# Altium PCB 175-00060, rev2, PCB, NRES RTD_TEC Board.PcbDoc (part 3 of 4)
Units mm, origin at the board's own origin, x right, y up, seen from the top; angles counter-clockwise.
Board outline 188.3 x 85 mm, 8 copper layers (Top Layer (*.GTL), MidLayer1 (*.G1), InternalPlane1 (*.GP1), InternalPlane2 (*.GP2), InternalPlane3 (*.GP3), InternalPlane4 (*.GP4), MidLayer2 (*.G2), Bottom Layer (*.GBL)), stack 1.748 mm thick; 256 components, 199 nets, 1067 pads, 575 vias.
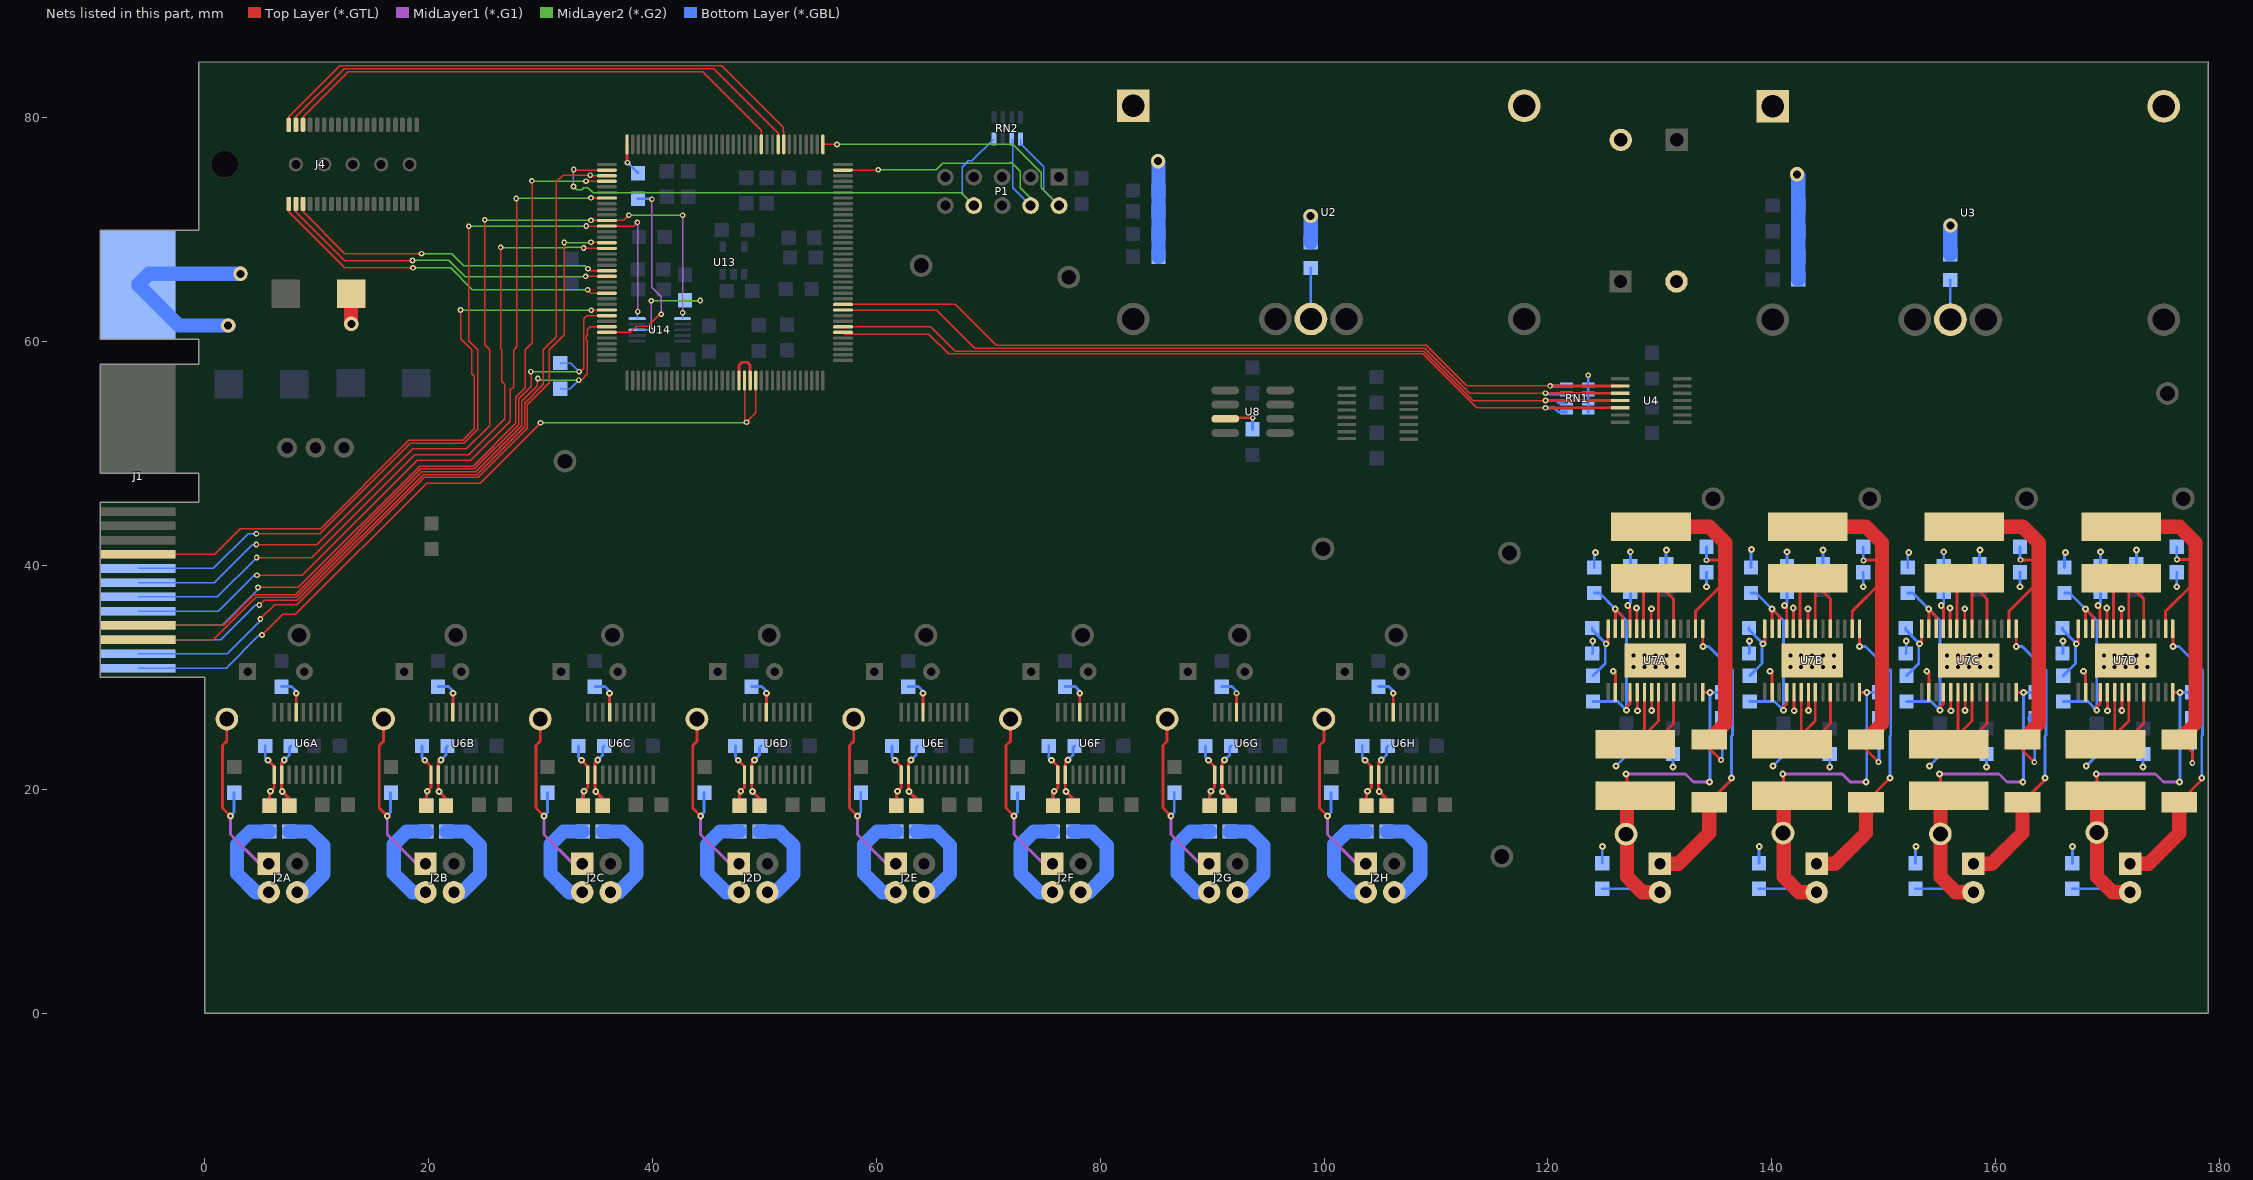
[diagram p9: the nets of this part, all layers, seen from the top]

## Via types
v1: diameter 0.508, hole 0.254, Top Layer (*.GTL) to Bottom Layer (*.GBL), tented both sides, 324 vias
v2: diameter 0.61, hole 0.254, Top Layer (*.GTL) to Bottom Layer (*.GBL), tented both sides, 234 vias
v3: diameter 1.27, hole 0.711, Top Layer (*.GTL) to Bottom Layer (*.GBL), 17 vias

## Nets (pads, with @x,y where several pads share a name; then routed paths per layer and width w, separated by ;. In a path a pad name is that pad's centre, name@x,y a point inside that pad or via, vN(x,y) a via of type N, cw(c..) or ccw(c..) an arc to the next point about the centre after c; other vN are vias at no path point) (continued)
I2C_SDA: J1.S21 U13.27 | length 58.9
  Top Layer (*.GTL) w0.127: J1.S21@-5.95,40.985 0.904,40.985 3.188,43.269 10.369,43.269 18.255,51.156 23.056,51.156 24.079,52.179 24.079,56.896 23.863,57.112 23.863,59.258 22.885,60.236 v1@22.885,62.814 ; v1(34.544,62.789) 34.561,62.806 U13.27@35.932,62.806
  MidLayer2 (*.G2) w0.127: v1(22.86,62.814) 22.885,62.789 v1(34.544,62.789)
LV_TEC_ENB_0: RN1.2 U4.2 U13.83 | length 74
  Top Layer (*.GTL) w0.127: U13.83@57.032,63.306 67.047,63.306 70.714,59.639 109.118,59.639 112.736,56.022 v1@120.203,56.022
  Top Layer (*.GTL) w0.254: v1@120.203,56.022 U4.2@126.454,56.022
  Bottom Layer (*.GBL) w0.254: v1@120.269,56.108 v1(120.193,56.032) 121.57,56.032 RN1.2@121.646,56.108
LV_TEC_ENB_1: RN1.4 U4.3 U13.82 | length 74.4
  Top Layer (*.GTL) w0.127: U13.82@57.032,62.806 65.388,62.806 68.809,59.385 109.013,59.385 113.026,55.372 120.203,55.372
  Top Layer (*.GTL) w0.254: 120.203,55.372 U4.3@126.454,55.372
  Bottom Layer (*.GBL) w0.254: v1(119.786,55.382) 119.86,55.308 RN1.4@121.646,55.308
LV_TEC_ENB_2: RN1.6 U4.4 U13.79 | length 74.1
  Top Layer (*.GTL) w0.127: U13.79@57.032,61.306 64.881,61.306 67.056,59.131 108.908,59.131 113.317,54.722 v1(119.786,54.722) 120.203,54.722
  Top Layer (*.GTL) w0.254: 120.203,54.722 U4.4@126.454,54.722
  Bottom Layer (*.GBL) w0.254: v1(119.786,54.722) 120.723,54.722 120.936,54.508 RN1.6@121.646,54.508
LV_TEC_ENB_3: RN1.8 U4.5 U13.78 | length 74.2
  Top Layer (*.GTL) w0.127: U13.78@57.032,60.806 57.192,60.647 64.7,60.647 66.469,58.877 108.803,58.877 113.618,54.062 v1(119.786,54.062)
  Top Layer (*.GTL) w0.254: v1(119.786,54.062) 119.797,54.072 U4.5@126.454,54.072
  Bottom Layer (*.GBL) w0.254: v1(119.786,54.062) 120.583,54.062 120.936,53.708 RN1.8@121.646,53.708
MISO: J1.S6 U13.16 | length 64.4
  Top Layer (*.GTL) w0.127: v1(4.648,40.691) 9.587,40.691 18.781,49.886 23.582,49.886 26.797,53.101 26.797,56.185 26.53,56.451 26.53,59.258 26.441,59.347 v1(26.441,68.402) ; v1(33.858,68.351) 33.904,68.306 U13.16@35.932,68.306
  MidLayer2 (*.G2) w0.127: v1(26.441,68.402) 26.454,68.389 32.315,68.389 32.328,68.402 33.858,68.402 v1(33.858,68.351)
  Bottom Layer (*.GBL) w0.127: J1.S6@-5.95,37.175 1.133,37.175 v1(4.648,40.691)
MOSI: J1.S2 U13.15 | length 65
  Top Layer (*.GTL) w0.127: v1(4.978,35.204) 6.248,36.474 8.244,36.474 19.623,47.854 24.424,47.854 28.829,52.259 28.829,54.331 30.797,56.299 30.797,59.258 32.131,60.592 v1(32.131,68.834) ; v1(34.519,68.859) 35.879,68.859 U13.15@35.932,68.806
  MidLayer2 (*.G2) w0.127: v1(32.131,68.834) 34.493,68.834 v1(34.519,68.859)
  Bottom Layer (*.GBL) w0.127: J1.S2@-5.95,32.095 2.022,32.095 4.978,35.052 v1(4.978,35.204)
NetC20A_2: C20A.2 U6A.7 | length 3.4
  Top Layer (*.GTL) w0.254: U6A.7@8.174,26.861 8.179,26.865 v2(8.179,28.575)
  Bottom Layer (*.GBL) w0.254: C20A.2@6.858,29.159 7.772,29.159 8.179,28.753 v2(8.179,28.575)
NetC20B_2: C20B.2 U6B.7 | length 3.4
  Top Layer (*.GTL) w0.254: U6B.7@22.174,26.861 22.179,26.865 v2(22.179,28.575)
  Bottom Layer (*.GBL) w0.254: C20B.2@20.858,29.159 21.772,29.159 22.179,28.753 v2(22.179,28.575)
NetC20C_2: C20C.2 U6C.7 | length 3.4
  Top Layer (*.GTL) w0.254: U6C.7@36.174,26.861 36.179,26.865 v2(36.179,28.575)
  Bottom Layer (*.GBL) w0.254: C20C.2@34.858,29.159 35.772,29.159 36.179,28.753 v2(36.179,28.575)
NetC20D_2: C20D.2 U6D.7 | length 3.4
  Top Layer (*.GTL) w0.254: U6D.7@50.174,26.861 50.179,26.865 v2(50.179,28.575)
  Bottom Layer (*.GBL) w0.254: C20D.2@48.858,29.159 49.772,29.159 50.179,28.753 v2(50.179,28.575)
NetC20E_2: C20E.2 U6E.7 | length 3.4
  Top Layer (*.GTL) w0.254: U6E.7@64.174,26.861 64.179,26.865 v2(64.179,28.575)
  Bottom Layer (*.GBL) w0.254: C20E.2@62.858,29.159 63.772,29.159 64.179,28.753 v2(64.179,28.575)
NetC20F_2: C20F.2 U6F.7 | length 3.4
  Top Layer (*.GTL) w0.254: U6F.7@78.174,26.861 78.179,26.865 v2(78.179,28.575)
  Bottom Layer (*.GBL) w0.254: C20F.2@76.858,29.159 77.772,29.159 78.179,28.753 v2(78.179,28.575)
NetC20G_2: C20G.2 U6G.7 | length 3.4
  Top Layer (*.GTL) w0.254: U6G.7@92.174,26.861 92.179,26.865 v1(92.179,28.575)
  Bottom Layer (*.GBL) w0.254: C20G.2@90.858,29.159 91.772,29.159 92.179,28.753 v1(92.179,28.575)
NetC20H_2: C20H.2 U6H.7 | length 3.4
  Top Layer (*.GTL) w0.254: U6H.7@106.174,26.861 106.179,26.865 v2(106.179,28.575)
  Bottom Layer (*.GBL) w0.254: C20H.2@104.858,29.159 105.772,29.159 106.179,28.753 v2(106.179,28.575)
NetC21A_1: C21A.1 C25A.2 L1A.2 R7A.2 U7A.16 | length 39.7
  Top Layer (*.GTL) w0.254: U7A.16@133.175,34.348 133.175,35.895 135.842,38.562 135.842,38.613 ; v1(134.163,40.462) 135.842,40.462 ; R7A.2@134.4,24.44 134.4,23.664 v1(135.458,22.606)
  Top Layer (*.GTL) w1.27: L1A.2@129.2,43.451 134.407,43.451 135.842,42.017 135.842,40.462 135.842,38.613 ; R7A.2@134.4,24.44 135.842,25.882 135.842,38.562
  Bottom Layer (*.GBL) w0.254: v1(134.163,40.462) 134.166,40.465 C21A.1@134.166,41.661 ; v1(135.458,22.606) 135.563,22.71 C25A.2@135.563,26.37
NetC21B_1: C21B.1 C25B.2 L1B.2 R7B.2 U7B.16 | length 40.1
  Top Layer (*.GTL) w0.254: U7B.16@147.175,34.348 147.175,35.895 149.842,38.562 ; v1(148.184,40.437) 148.234,40.488 149.842,40.488 ; R7B.2@148.4,24.44 148.4,23.558 v1(149.53,22.428)
  Top Layer (*.GTL) w1.27: L1B.2@143.2,43.451 148.407,43.451 149.842,42.017 149.842,40.488 149.842,38.562 149.842,25.882 R7B.2@148.4,24.44
  Bottom Layer (*.GBL) w0.254: C21B.1@148.166,41.661 148.166,40.455 v1(148.184,40.437) ; v1(149.53,22.428) 149.563,22.461 C25B.2@149.563,26.37
NetC21C_1: C21C.1 C25C.2 L1C.2 R7C.2 U7C.16 | length 40.1
  Top Layer (*.GTL) w0.254: U7C.16@161.175,34.348 161.175,35.895 163.842,38.562 163.842,38.613 ; v1(162.204,40.488) 163.817,40.488 163.842,40.513 ; R7C.2@162.4,24.44 162.4,23.452 v1(163.449,22.403)
  Top Layer (*.GTL) w1.27: L1C.2@157.2,43.451 162.407,43.451 163.842,42.017 163.842,40.513 163.842,38.613 ; R7C.2@162.4,24.44 163.842,25.882 163.842,38.562
  Bottom Layer (*.GBL) w0.254: C21C.1@162.166,41.661 162.166,40.526 v1(162.204,40.488) ; v1(163.449,22.403) 163.486,22.44 C25C.2@163.486,26.294
  Bottom Layer (*.GBL) w1.27: C25C.2@163.486,26.294 C25C.2@163.563,26.37
NetC21D_1: C21D.1 C25D.2 L1D.2 R7D.2 U7D.16 | length 40.2
  Top Layer (*.GTL) w0.254: U7D.16@175.175,34.348 175.175,35.895 177.842,38.562 177.842,38.613 ; v1(176.2,40.513) 177.817,40.513 177.842,40.488 ; R7D.2@176.4,24.44 177.563,23.277 v1(177.563,22.335)
  Top Layer (*.GTL) w1.27: L1D.2@171.2,43.451 176.407,43.451 177.842,42.017 177.842,40.488 177.842,38.613 ; R7D.2@176.4,24.44 177.842,25.882 177.842,38.562
  Bottom Layer (*.GBL) w0.254: C21D.1@176.166,41.661 176.166,40.547 v1(176.2,40.513) ; v1(177.563,22.335) C25D.2@177.563,26.37
NetC26A_2: C26A.2 R8A.2 U7A.4 U7A.26 U7A.27 | length 20.7
  Top Layer (*.GTL) w0.254: v2(126.012,36.098) v2@126.025,36.086 ; U7A.27@126.025,34.348 v2@126.025,36.086 ; U7A.26@126.675,34.348 126.675,35.436 v2@126.025,36.086 ; v2(127.028,27.056) 127.028,27.335 127.325,27.632 U7A.4@127.325,28.648
  Bottom Layer (*.GBL) w0.254: R8A.2@124.031,27.843 126.241,27.843 v2(127.028,27.056) 127.028,35.082 v2(126.012,36.098) 124.59,37.521 C26A.2@124.133,37.521
NetC26B_2: C26B.2 R8B.2 U7B.4 U7B.26 U7B.27 | length 20.7
  Top Layer (*.GTL) w0.254: v2(140.012,36.098) v2@140.025,36.086 ; U7B.27@140.025,34.348 v2@140.025,36.086 ; U7B.26@140.675,34.348 140.675,35.436 v2@140.025,36.086 ; v2(141.028,27.056) 141.028,27.335 141.325,27.632 U7B.4@141.325,28.648
  Bottom Layer (*.GBL) w0.254: R8B.2@138.031,27.843 140.241,27.843 v2(141.028,27.056) 141.028,35.082 v2(140.012,36.098) 138.59,37.521 C26B.2@138.133,37.521
NetC26C_2: C26C.2 R8C.2 U7C.4 U7C.26 U7C.27 | length 20.7
  Top Layer (*.GTL) w0.254: v2(154.012,36.098) v2@154.025,36.086 ; U7C.27@154.025,34.348 v2@154.025,36.086 ; U7C.26@154.675,34.348 154.675,35.436 v2@154.025,36.086 ; v2(155.028,27.056) 155.028,27.335 155.325,27.632 U7C.4@155.325,28.648
  Bottom Layer (*.GBL) w0.254: R8C.2@152.031,27.843 154.241,27.843 v2(155.028,27.056) 155.028,35.082 v2(154.012,36.098) 152.59,37.521 C26C.2@152.133,37.521
NetC26D_2: C26D.2 R8D.2 U7D.4 U7D.26 U7D.27 | length 20.7
  Top Layer (*.GTL) w0.254: v2(168.012,36.098) v2@168.025,36.086 ; U7D.27@168.025,34.348 v2@168.025,36.086 ; U7D.26@168.675,34.348 168.675,35.436 v2@168.025,36.086 ; v2(169.028,27.056) 169.028,27.335 169.325,27.632 U7D.4@169.325,28.648
  Bottom Layer (*.GBL) w0.254: R8D.2@166.031,27.843 168.241,27.843 v2(169.028,27.056) 169.028,35.082 v2(168.012,36.098) 166.59,37.521 C26D.2@166.133,37.521
NetC28A_2: C28A.2 U7A.25 | length 3.4
  Top Layer (*.GTL) w0.254: v2(127.13,36.403) 127.325,36.208 U7A.25@127.325,34.348
  Bottom Layer (*.GBL) w0.254: v2(127.13,36.403) 127.358,36.632 C28A.2@127.358,37.622
NetC28B_2: C28B.2 U7B.25 | length 3.4
  Top Layer (*.GTL) w0.254: v2(141.13,36.403) 141.325,36.208 U7B.25@141.325,34.348
  Bottom Layer (*.GBL) w0.254: v2(141.13,36.403) 141.358,36.632 C28B.2@141.358,37.622
NetC28C_2: C28C.2 U7C.25 | length 3.4
  Top Layer (*.GTL) w0.254: v2(155.13,36.403) 155.325,36.208 U7C.25@155.325,34.348
  Bottom Layer (*.GBL) w0.254: v2(155.13,36.403) 155.358,36.632 C28C.2@155.358,37.622
NetC28D_2: C28D.2 U7D.25 | length 3.4
  Top Layer (*.GTL) w0.254: v2(169.13,36.403) 169.325,36.208 U7D.25@169.325,34.348
  Bottom Layer (*.GBL) w0.254: v2(169.13,36.403) 169.358,36.632 C28D.2@169.358,37.622
NetC30_1: C30.1 U8.3 | length 3.5
  Top Layer (*.GTL) w0.254: U8.3@91.174,53.086 91.276,53.188 v1(93.624,53.188)
  Bottom Layer (*.GBL) w0.254: C30.1@93.599,52.146 93.599,53.162 v1(93.624,53.188)
NetJ2A_1: J2A.1 R3A.1 TP5A.1 | length 17.5
  Top Layer (*.GTL) w0.254: TP5A.1@1.981,26.264 1.981,24.282 1.6,23.901 1.6,18.313 v2(2.311,17.602)
  MidLayer1 (*.G1) w0.254: v2(2.311,17.602) 2.311,15.951 4.923,13.34 J2A.1@5.73,13.34
  Bottom Layer (*.GBL) w0.254: v2(2.311,17.602) 2.616,17.907 R3A.1@2.616,19.71
NetJ2A_2: J2A.2 R4A.1 | length 9.5
  Bottom Layer (*.GBL) w0.254: J2A.2@4.796,10.8 J2A.2@5.73,10.8
  Bottom Layer (*.GBL) w1.27: J2A.2@4.796,10.8 4.567,10.8 2.896,12.471 2.896,15.062 4.064,16.231 R4A.1@5.791,16.231
NetJ2A_3: J2A.3 R5A.1 | length 9.1
  Bottom Layer (*.GBL) w0.254: J2A.3@8.27,10.8 J2A.3@8.275,10.795
  Bottom Layer (*.GBL) w1.27: R5A.1@7.569,16.231 9.322,16.231 10.592,14.961 10.592,12.395 8.997,10.8 J2A.3@8.27,10.8
NetJ2B_1: J2B.1 R3B.1 TP5B.1 | length 17.5
  Top Layer (*.GTL) w0.254: TP5B.1@15.981,26.264 15.981,24.282 15.6,23.901 15.6,18.313 v2(16.311,17.602)
  MidLayer1 (*.G1) w0.254: v2(16.311,17.602) 16.311,15.951 18.923,13.34 J2B.1@19.73,13.34
  Bottom Layer (*.GBL) w0.254: v2(16.311,17.602) 16.616,17.907 R3B.1@16.616,19.71
NetJ2B_2: J2B.2 R4B.1 | length 9.5
  Bottom Layer (*.GBL) w0.254: J2B.2@18.796,10.8 J2B.2@19.73,10.8
  Bottom Layer (*.GBL) w1.27: J2B.2@18.796,10.8 18.567,10.8 16.896,12.471 16.896,15.062 18.064,16.231 R4B.1@19.791,16.231
NetJ2B_3: J2B.3 R5B.1 | length 9.1
  Bottom Layer (*.GBL) w0.254: J2B.3@22.27,10.8 J2B.3@22.275,10.795
  Bottom Layer (*.GBL) w1.27: R5B.1@21.569,16.231 23.322,16.231 24.592,14.961 24.592,12.395 22.997,10.8 J2B.3@22.27,10.8
NetJ2C_1: J2C.1 R3C.1 TP5C.1 | length 17.5
  Top Layer (*.GTL) w0.254: TP5C.1@29.981,26.264 29.981,24.282 29.6,23.901 29.6,18.313 v2(30.311,17.602)
  MidLayer1 (*.G1) w0.254: v2(30.311,17.602) 30.311,15.951 32.923,13.34 J2C.1@33.73,13.34
  Bottom Layer (*.GBL) w0.254: v2(30.311,17.602) 30.616,17.907 R3C.1@30.616,19.71
NetJ2C_2: J2C.2 R4C.1 | length 9.5
  Bottom Layer (*.GBL) w0.254: J2C.2@32.796,10.8 J2C.2@33.73,10.8
  Bottom Layer (*.GBL) w1.27: J2C.2@32.796,10.8 32.567,10.8 30.896,12.471 30.896,15.062 32.064,16.231 R4C.1@33.791,16.231
NetJ2C_3: J2C.3 R5C.1 | length 9.1
  Bottom Layer (*.GBL) w0.254: J2C.3@36.27,10.8 J2C.3@36.275,10.795
  Bottom Layer (*.GBL) w1.27: R5C.1@35.569,16.231 37.322,16.231 38.592,14.961 38.592,12.395 36.997,10.8 J2C.3@36.27,10.8
NetJ2D_1: J2D.1 R3D.1 TP5D.1 | length 17.5
  Top Layer (*.GTL) w0.254: TP5D.1@43.981,26.264 43.981,24.282 43.6,23.901 43.6,18.313 v2(44.311,17.602)
  MidLayer1 (*.G1) w0.254: v2(44.311,17.602) 44.311,15.951 46.923,13.34 J2D.1@47.73,13.34
  Bottom Layer (*.GBL) w0.254: v2(44.311,17.602) 44.616,17.907 R3D.1@44.616,19.71
NetJ2D_2: J2D.2 R4D.1 | length 9.5
  Bottom Layer (*.GBL) w0.254: J2D.2@46.796,10.8 J2D.2@47.73,10.8
  Bottom Layer (*.GBL) w1.27: J2D.2@46.796,10.8 46.567,10.8 44.896,12.471 44.896,15.062 46.064,16.231 R4D.1@47.791,16.231
NetJ2D_3: J2D.3 R5D.1 | length 9.1
  Bottom Layer (*.GBL) w0.254: J2D.3@50.27,10.8 J2D.3@50.275,10.795
  Bottom Layer (*.GBL) w1.27: R5D.1@49.569,16.231 51.322,16.231 52.592,14.961 52.592,12.395 50.997,10.8 J2D.3@50.27,10.8
NetJ2E_1: J2E.1 R3E.1 TP5E.1 | length 17.5
  Top Layer (*.GTL) w0.254: TP5E.1@57.981,26.264 57.981,24.282 57.6,23.901 57.6,18.313 v2(58.311,17.602)
  MidLayer1 (*.G1) w0.254: v2(58.311,17.602) 58.311,15.951 60.923,13.34 J2E.1@61.73,13.34
  Bottom Layer (*.GBL) w0.254: v2(58.311,17.602) 58.616,17.907 R3E.1@58.616,19.71
NetJ2E_2: J2E.2 R4E.1 | length 9.5
  Bottom Layer (*.GBL) w0.254: J2E.2@60.796,10.8 J2E.2@61.73,10.8
  Bottom Layer (*.GBL) w1.27: J2E.2@60.796,10.8 60.567,10.8 58.896,12.471 58.896,15.062 60.064,16.231 R4E.1@61.791,16.231
NetJ2E_3: J2E.3 R5E.1 | length 9.1
  Bottom Layer (*.GBL) w0.254: J2E.3@64.27,10.8 J2E.3@64.275,10.795
  Bottom Layer (*.GBL) w1.27: R5E.1@63.569,16.231 65.322,16.231 66.592,14.961 66.592,12.395 64.997,10.8 J2E.3@64.27,10.8
NetJ2F_1: J2F.1 R3F.1 TP5F.1 | length 17.5
  Top Layer (*.GTL) w0.254: TP5F.1@71.981,26.264 71.981,24.282 71.6,23.901 71.6,18.313 v2(72.311,17.602)
  MidLayer1 (*.G1) w0.254: v2(72.311,17.602) 72.311,15.951 74.923,13.34 J2F.1@75.73,13.34
  Bottom Layer (*.GBL) w0.254: v2(72.311,17.602) 72.616,17.907 R3F.1@72.616,19.71
NetJ2F_2: J2F.2 R4F.1 | length 9.5
  Bottom Layer (*.GBL) w0.254: J2F.2@74.796,10.8 J2F.2@75.73,10.8
  Bottom Layer (*.GBL) w1.27: J2F.2@74.796,10.8 74.567,10.8 72.896,12.471 72.896,15.062 74.064,16.231 R4F.1@75.791,16.231
NetJ2F_3: J2F.3 R5F.1 | length 9.1
  Bottom Layer (*.GBL) w0.254: J2F.3@78.27,10.8 J2F.3@78.275,10.795
  Bottom Layer (*.GBL) w1.27: R5F.1@77.569,16.231 79.322,16.231 80.592,14.961 80.592,12.395 78.997,10.8 J2F.3@78.27,10.8
NetJ2G_1: J2G.1 R3G.1 TP5G.1 | length 17.5
  Top Layer (*.GTL) w0.254: TP5G.1@85.981,26.264 85.981,24.282 85.6,23.901 85.6,18.313 v2(86.311,17.602)
  MidLayer1 (*.G1) w0.254: v2(86.311,17.602) 86.311,15.951 88.923,13.34 J2G.1@89.73,13.34
  Bottom Layer (*.GBL) w0.254: v2(86.311,17.602) 86.616,17.907 R3G.1@86.616,19.71
NetJ2G_2: J2G.2 R4G.1 | length 9.5
  Bottom Layer (*.GBL) w0.254: J2G.2@88.796,10.8 J2G.2@89.73,10.8
  Bottom Layer (*.GBL) w1.27: J2G.2@88.796,10.8 88.567,10.8 86.896,12.471 86.896,15.062 88.064,16.231 R4G.1@89.791,16.231
NetJ2G_3: J2G.3 R5G.1 | length 9.1
  Bottom Layer (*.GBL) w0.254: J2G.3@92.27,10.8 J2G.3@92.275,10.795
  Bottom Layer (*.GBL) w1.27: R5G.1@91.569,16.231 93.322,16.231 94.592,14.961 94.592,12.395 92.997,10.8 J2G.3@92.27,10.8
NetJ2H_1: J2H.1 R3H.1 TP5H.1 | length 17.5
  Top Layer (*.GTL) w0.254: TP5H.1@99.981,26.264 99.981,24.282 99.6,23.901 99.6,18.313 v2(100.311,17.602)
  MidLayer1 (*.G1) w0.254: v2(100.311,17.602) 100.311,15.951 102.923,13.34 J2H.1@103.73,13.34
  Bottom Layer (*.GBL) w0.254: v2(100.311,17.602) 100.616,17.907 R3H.1@100.616,19.71
NetJ2H_2: J2H.2 R4H.1 | length 9.5
  Bottom Layer (*.GBL) w0.254: J2H.2@102.796,10.8 J2H.2@103.73,10.8
  Bottom Layer (*.GBL) w1.27: J2H.2@102.796,10.8 102.567,10.8 100.896,12.471 100.896,15.062 102.064,16.231 R4H.1@103.791,16.231
NetJ2H_3: J2H.3 R5H.1 | length 9.1
  Bottom Layer (*.GBL) w0.254: J2H.3@106.27,10.8 J2H.3@106.275,10.795
  Bottom Layer (*.GBL) w1.27: R5H.1@105.569,16.231 107.322,16.231 108.592,14.961 108.592,12.395 106.997,10.8 J2H.3@106.27,10.8
NetL1A_1: L1A.1 U7A.19 U7A.21 U7A.23 | length 15
  Top Layer (*.GTL) w0.254: U7A.23@128.525,34.348 128.525,38.179 L1A.1@129.2,38.854 ; U7A.21@129.875,34.348 129.875,38.179 L1A.1@129.2,38.854 ; U7A.19@131.225,34.348 131.225,36.982 129.353,38.854 L1A.1@129.2,38.854
NetL1B_1: L1B.1 U7B.19 U7B.21 U7B.23 | length 15
  Top Layer (*.GTL) w0.254: U7B.23@142.525,34.348 142.525,38.179 L1B.1@143.2,38.854 ; U7B.21@143.875,34.348 143.875,38.179 L1B.1@143.2,38.854 ; U7B.19@145.225,34.348 145.225,36.982 143.353,38.854 L1B.1@143.2,38.854
NetL1C_1: L1C.1 U7C.19 U7C.21 U7C.23 | length 15
  Top Layer (*.GTL) w0.254: U7C.23@156.525,34.348 156.525,38.179 L1C.1@157.2,38.854 ; U7C.21@157.875,34.348 157.875,38.179 L1C.1@157.2,38.854 ; U7C.19@159.225,34.348 159.225,36.982 157.353,38.854 L1C.1@157.2,38.854
NetL1D_1: L1D.1 U7D.19 U7D.21 U7D.23 | length 15
  Top Layer (*.GTL) w0.254: U7D.23@170.525,34.348 170.525,38.179 L1D.1@171.2,38.854 ; U7D.21@171.875,34.348 171.875,38.179 L1D.1@171.2,38.854 ; U7D.19@173.225,34.348 173.225,36.982 171.353,38.854 L1D.1@171.2,38.854
NetL2A_1: L2A.1 U7A.6 U7A.8 U7A.10 | length 16.2
  Top Layer (*.GTL) w0.254: U7A.6@128.625,28.648 L2A.1@128.625,24.851 ; U7A.8@129.875,28.648 129.875,26.101 L2A.1@128.625,24.851 ; U7A.10@131.225,28.648 131.225,25.868 129.383,24.026 L2A.1@127.8,24.026 L2A.1@128.625,24.851
NetL2B_1: L2B.1 U7B.6 U7B.8 U7B.10 | length 16.2
  Top Layer (*.GTL) w0.254: U7B.6@142.625,28.648 L2B.1@142.625,24.851 ; U7B.8@143.875,28.648 143.875,26.101 L2B.1@142.625,24.851 ; U7B.10@145.225,28.648 145.225,25.868 143.383,24.026 L2B.1@141.8,24.026 L2B.1@142.625,24.851
NetL2C_1: L2C.1 U7C.6 U7C.8 U7C.10 | length 16.2
  Top Layer (*.GTL) w0.254: U7C.6@156.625,28.648 L2C.1@156.625,24.851 ; U7C.8@157.875,28.648 157.875,26.101 L2C.1@156.625,24.851 ; U7C.10@159.225,28.648 159.225,25.868 157.383,24.026 L2C.1@155.8,24.026 L2C.1@156.625,24.851
NetL2D_1: L2D.1 U7D.6 U7D.8 U7D.10 | length 16.2
  Top Layer (*.GTL) w0.254: U7D.6@170.625,28.648 L2D.1@170.625,24.851 ; U7D.8@171.875,28.648 171.875,26.101 L2D.1@170.625,24.851 ; U7D.10@173.225,28.648 173.225,25.868 171.383,24.026 L2D.1@169.8,24.026 L2D.1@170.625,24.851
NetR1_2: R1.2 U2.4 | length 4.6
  Bottom Layer (*.GBL) w0.254: R1.2@98.806,66.548 98.806,62.019 U2.4@98.825,62
NetR2_2: R2.2 U3.4 | length 3.5
  Bottom Layer (*.GBL) w0.254: R2.2@155.931,65.481 155.931,61.969 U3.4@155.95,61.95
NetR8A_1: R8A.1 R9A.2 U7A.28 | length 6.7
  Top Layer (*.GTL) w0.254: v2(125.199,33) 125.375,33.175 U7A.28@125.375,34.348
  Bottom Layer (*.GBL) w0.254: R9A.2@123.955,34.397 123.955,34.244 v2(125.199,33) 125.123,32.923 125.123,31.222 R8A.1@124.031,30.129
NetR8B_1: R8B.1 R9B.2 U7B.28 | length 6.7
  Top Layer (*.GTL) w0.254: v2(139.199,33) 139.375,33.175 U7B.28@139.375,34.348
  Bottom Layer (*.GBL) w0.254: R9B.2@137.955,34.397 137.955,34.244 v2(139.199,33) 139.123,32.923 139.123,31.222 R8B.1@138.031,30.129
NetR8C_1: R8C.1 R9C.2 U7C.28 | length 6.7
  Top Layer (*.GTL) w0.254: v2(153.199,33) 153.375,33.175 U7C.28@153.375,34.348
  Bottom Layer (*.GBL) w0.254: R9C.2@151.955,34.397 151.955,34.244 v2(153.199,33) 153.123,32.923 153.123,31.222 R8C.1@152.031,30.129
NetR8D_1: R8D.1 R9D.2 U7D.28 | length 6.7
  Top Layer (*.GTL) w0.254: v2(167.199,33) 167.375,33.175 U7D.28@167.375,34.348
  Bottom Layer (*.GBL) w0.254: R9D.2@165.955,34.397 165.955,34.244 v2(167.199,33) 167.123,32.923 167.123,31.222 R8D.1@166.031,30.129
NetR10_1: R10.1 U14.8 | length 9.6
  MidLayer1 (*.G1) w0.127: v1(39.878,61.011) 39.878,63.602 v1(39.903,63.627)
  MidLayer2 (*.G2) w0.127: v1(39.903,63.627) 44.247,63.627 v1(44.272,63.652)
  Bottom Layer (*.GBL) w0.127: U14.8@38.64,61.036 39.853,61.036 v1(39.878,61.011) ; R10.1@42.901,63.678 42.926,63.652 v1(44.272,63.652)
NetR11_1: R11.1 U13.31 | length 17.4
  Top Layer (*.GTL) w0.127: U13.31@35.932,60.806 38.022,60.806 38.583,61.366 39.605,61.366 40.672,62.433 v1(40.792,62.433)
  MidLayer1 (*.G1) w0.127: v1(39.954,72.695) 39.954,64.821 40.792,63.983 v1(40.792,62.433)
  Bottom Layer (*.GBL) w0.254: R11.1@38.71,72.746 39.903,72.746 v1(39.954,72.695)
NetR11_2: R11.2 U13.144 | length 3
  Top Layer (*.GTL) w0.254: U13.144@37.732,77.606 37.732,76.009 v1(37.77,75.971)
  Bottom Layer (*.GBL) w0.254: v1(37.77,75.971) R11.2@38.71,75.032
NetU13_57: U13.57 U13.59 | length 4
  Top Layer (*.GTL) w0.254: U13.57@47.732,56.506 47.732,57.867 48.006,58.141 48.489,58.141 48.732,57.897 U13.59@48.732,56.506
RSET: J1.S5 U13.7 | length 68.7
  Top Layer (*.GTL) w0.127: v1(4.674,39.116) 8.73,39.116 18.992,49.378 23.792,49.378 27.305,52.89 27.305,55.677 27.597,55.969 27.597,59.258 27.864,59.525 v1@27.864,72.771 ; v1(34.519,72.822) v1@34.503,72.806 ; U13.7@35.932,72.806 v1@34.503,72.806 ; v1@34.503,72.806 34.477,72.806 34.442,72.771 34.468,72.771 v1@34.503,72.806
  MidLayer2 (*.G2) w0.127: v1(27.838,72.771) 34.468,72.771 v1(34.519,72.822)
  Bottom Layer (*.GBL) w0.127: J1.S5@-5.95,35.905 1.209,35.905 4.42,39.116 v1(4.674,39.116)
SCLK: J1.S1 U13.58 U13.60 | length 71.6
  Top Layer (*.GTL) w0.127: v1(5.131,33.782) 6.96,35.611 8.099,35.611 19.833,47.346 24.634,47.346 29.997,52.709 v1(29.997,52.73) ; U13.58@48.232,56.506 48.232,52.643 49.232,53.643 U13.60@49.232,56.506
  MidLayer2 (*.G2) w0.127: v1(29.997,52.73) 48.362,52.73 v1(48.412,52.781)
  Bottom Layer (*.GBL) w0.127: J1.S1@-5.95,30.825 1.92,30.825 4.877,33.782 v1(5.131,33.782)
SENSE+A: C17A.2 C18A.2 R4A.2 U6A.11 | length 7.2
  Top Layer (*.GTL) w0.254: v2(5.664,22.581) 6.224,22.021 U6A.11@6.224,21.311 6.224,20.143 v2(5.893,19.812) 5.791,19.71 C17A.2@5.791,18.517
  Bottom Layer (*.GBL) w0.254: C18A.2@5.41,23.851 5.41,22.835 v2(5.664,22.581) ; R4A.2@5.791,18.517 5.791,19.71 v2(5.893,19.812)
SENSE+B: C17B.2 C18B.2 R4B.2 U6B.11 | length 7.2
  Top Layer (*.GTL) w0.254: v2(19.664,22.581) 20.224,22.021 U6B.11@20.224,21.311 20.224,20.143 v2(19.893,19.812) 19.791,19.71 C17B.2@19.791,18.517
  Bottom Layer (*.GBL) w0.254: C18B.2@19.41,23.851 19.41,22.835 v2(19.664,22.581) ; R4B.2@19.791,18.517 19.791,19.71 v2(19.893,19.812)
SENSE+C: C17C.2 C18C.2 R4C.2 U6C.11 | length 7.2
  Top Layer (*.GTL) w0.254: v2(33.664,22.581) 34.224,22.021 U6C.11@34.224,21.311 34.224,20.143 v2(33.893,19.812) 33.791,19.71 C17C.2@33.791,18.517
  Bottom Layer (*.GBL) w0.254: C18C.2@33.41,23.851 33.41,22.835 v2(33.664,22.581) ; R4C.2@33.791,18.517 33.791,19.71 v2(33.893,19.812)
SENSE+D: C17D.2 C18D.2 R4D.2 U6D.11 | length 7.2
  Top Layer (*.GTL) w0.254: v2(47.664,22.581) 48.224,22.021 U6D.11@48.224,21.311 48.224,20.143 v2(47.893,19.812) 47.791,19.71 C17D.2@47.791,18.517
  Bottom Layer (*.GBL) w0.254: C18D.2@47.41,23.851 47.41,22.835 v2(47.664,22.581) ; R4D.2@47.791,18.517 47.791,19.71 v2(47.893,19.812)
SENSE+E: C17E.2 C18E.2 R4E.2 U6E.11 | length 7.2
  Top Layer (*.GTL) w0.254: v2(61.664,22.581) 62.224,22.021 U6E.11@62.224,21.311 62.224,20.143 v2(61.893,19.812) 61.791,19.71 C17E.2@61.791,18.517
  Bottom Layer (*.GBL) w0.254: C18E.2@61.41,23.851 61.41,22.835 v2(61.664,22.581) ; R4E.2@61.791,18.517 61.791,19.71 v2(61.893,19.812)
SENSE+F: C17F.2 C18F.2 R4F.2 U6F.11 | length 7.2
  Top Layer (*.GTL) w0.254: v2(75.664,22.581) 76.224,22.021 U6F.11@76.224,21.311 76.224,20.143 v2(75.893,19.812) 75.791,19.71 C17F.2@75.791,18.517
  Bottom Layer (*.GBL) w0.254: C18F.2@75.41,23.851 75.41,22.835 v2(75.664,22.581) ; R4F.2@75.791,18.517 75.791,19.71 v2(75.893,19.812)
SENSE+G: C17G.2 C18G.2 R4G.2 U6G.11 | length 7.2
  Top Layer (*.GTL) w0.254: v2(89.664,22.581) 90.224,22.021 U6G.11@90.224,21.311 90.224,20.143 v2(89.893,19.812) 89.791,19.71 C17G.2@89.791,18.517
  Bottom Layer (*.GBL) w0.254: C18G.2@89.41,23.851 89.41,22.835 v2(89.664,22.581) ; R4G.2@89.791,18.517 89.791,19.71 v2(89.893,19.812)
SENSE+H: C17H.2 C18H.2 R4H.2 U6H.11 | length 7.2
  Top Layer (*.GTL) w0.254: v2(103.664,22.581) 104.224,22.021 U6H.11@104.224,21.311 104.224,20.143 v2(103.893,19.812) 103.791,19.71 C17H.2@103.791,18.517
  Bottom Layer (*.GBL) w0.254: C18H.2@103.41,23.851 103.41,22.835 v2(103.664,22.581) ; R4H.2@103.791,18.517 103.791,19.71 v2(103.893,19.812)
SENSE-A: C18A.1 C19A.2 R5A.2 U6A.12 | length 6.9
  Top Layer (*.GTL) w0.254: v2(7.112,22.606) 6.874,22.368 U6A.12@6.874,21.311 6.874,19.847 v2(6.934,19.787) 7.569,19.152
  Bottom Layer (*.GBL) w0.254: v2(6.934,19.787) 7.569,19.152 R5A.2@7.569,18.517 ; v2(7.112,22.606) 7.569,23.063 7.569,23.724 C18A.1@7.696,23.851
SENSE-B: C18B.1 C19B.2 R5B.2 U6B.12 | length 6.9
  Top Layer (*.GTL) w0.254: v2(21.112,22.606) 20.874,22.368 U6B.12@20.874,21.311 20.874,19.847 v2(20.934,19.787) 21.569,19.152
  Bottom Layer (*.GBL) w0.254: v2(20.934,19.787) 21.569,19.152 R5B.2@21.569,18.517 ; v2(21.112,22.606) 21.569,23.063 21.569,23.724 C18B.1@21.696,23.851
SENSE-C: C18C.1 C19C.2 R5C.2 U6C.12 | length 6.9
  Top Layer (*.GTL) w0.254: v2(35.112,22.606) 34.874,22.368 U6C.12@34.874,21.311 34.874,19.847 v2(34.934,19.787) 35.569,19.152
  Bottom Layer (*.GBL) w0.254: v2(34.934,19.787) 35.569,19.152 R5C.2@35.569,18.517 ; v2(35.112,22.606) 35.569,23.063 35.569,23.724 C18C.1@35.696,23.851
SENSE-D: C18D.1 C19D.2 R5D.2 U6D.12 | length 6.9
  Top Layer (*.GTL) w0.254: v2(49.112,22.606) 48.874,22.368 U6D.12@48.874,21.311 48.874,19.847 v2(48.934,19.787) 49.569,19.152
  Bottom Layer (*.GBL) w0.254: v2(48.934,19.787) 49.569,19.152 R5D.2@49.569,18.517 ; v2(49.112,22.606) 49.569,23.063 49.569,23.724 C18D.1@49.696,23.851
SENSE-E: C18E.1 C19E.2 R5E.2 U6E.12 | length 6.9
  Top Layer (*.GTL) w0.254: v2(63.112,22.606) 62.874,22.368 U6E.12@62.874,21.311 62.874,19.847 v2(62.934,19.787) 63.569,19.152
  Bottom Layer (*.GBL) w0.254: v2(62.934,19.787) 63.569,19.152 R5E.2@63.569,18.517 ; v2(63.112,22.606) 63.569,23.063 63.569,23.724 C18E.1@63.696,23.851
SENSE-F: C18F.1 C19F.2 R5F.2 U6F.12 | length 6.9
  Top Layer (*.GTL) w0.254: v2(77.112,22.606) 76.874,22.368 U6F.12@76.874,21.311 76.874,19.847 v2(76.934,19.787) 77.569,19.152
  Bottom Layer (*.GBL) w0.254: v2(76.934,19.787) 77.569,19.152 R5F.2@77.569,18.517 ; v2(77.112,22.606) 77.569,23.063 77.569,23.724 C18F.1@77.696,23.851
SENSE-G: C18G.1 C19G.2 R5G.2 U6G.12 | length 6.9
  Top Layer (*.GTL) w0.254: v2(91.112,22.606) 90.874,22.368 U6G.12@90.874,21.311 90.874,19.847 v2(90.934,19.787) 91.569,19.152
  Bottom Layer (*.GBL) w0.254: v2(90.934,19.787) 91.569,19.152 R5G.2@91.569,18.517 ; v2(91.112,22.606) 91.569,23.063 91.569,23.724 C18G.1@91.696,23.851
SENSE-H: C18H.1 C19H.2 R5H.2 U6H.12 | length 6.9
  Top Layer (*.GTL) w0.254: v2(105.112,22.606) 104.874,22.368 U6H.12@104.874,21.311 104.874,19.847 v2(104.934,19.787) 105.569,19.152
  Bottom Layer (*.GBL) w0.254: v2(104.934,19.787) 105.569,19.152 R5H.2@105.569,18.517 ; v2(105.112,22.606) 105.569,23.063 105.569,23.724 C18H.1@105.696,23.851
SLOT_ADD_0: J1.S7 U13.11 U14.1 | length 82.9
  Top Layer (*.GTL) w0.127: v1(4.623,41.859) 10.036,41.859 18.571,50.394 23.371,50.394 25.463,52.486 25.463,59.258 25.019,59.703 v1(25.019,70.866) ; v1(34.519,70.815) 34.528,70.806 U13.11@35.932,70.806 37.43,70.806 v1(37.897,71.272)
  MidLayer1 (*.G1) w0.127: v1(42.697,62.56) v1(42.697,71.272)
  MidLayer2 (*.G2) w0.127: v1(25.019,70.866) 25.07,70.815 v1(34.519,70.815) ; v1(37.897,71.272) v1(42.697,71.272)
  Bottom Layer (*.GBL) w0.127: J1.S7@-5.95,38.445 0.853,38.445 4.267,41.859 v1(4.623,41.859) ; U14.1@42.69,62.036 42.69,62.553 v1(42.697,62.56)
SLOT_ADD_1: J1.S8 U13.12 U14.10 | length 78
  Top Layer (*.GTL) w0.127: v1(4.623,42.824) 10.283,42.824 18.36,50.902 23.161,50.902 24.397,52.137 24.397,59.258 23.597,60.058 v1(23.597,70.282) ; v1(34.087,70.307) 34.061,70.333 33.985,70.333 34.012,70.306 U13.12@35.932,70.306 38.327,70.306 v1(38.659,70.637)
  MidLayer1 (*.G1) w0.127: v1(38.659,70.637) 38.659,70.51 38.684,70.485 v1(38.684,62.662)
  MidLayer2 (*.G2) w0.127: v1(23.597,70.282) 23.622,70.307 v1(34.087,70.307)
  Bottom Layer (*.GBL) w0.127: J1.S8@-5.95,39.715 0.777,39.715 3.886,42.824 v1(4.623,42.824) ; U14.10@38.64,62.036 38.64,62.618 v1(38.684,62.662)
SPARE_LVDS_N: J1.S15 R12.2 U13.30 | length 59.7
  Top Layer (*.GTL) w0.127: J1.S15@-5.95,33.365 0.781,33.365 4.55,37.135 8.186,37.135 19.413,48.362 24.213,48.362 28.321,52.469 28.321,54.635 29.731,56.045 v1@29.731,56.693 ; v1(33.426,56.54) 33.477,56.591 33.68,56.591 34.188,57.099 34.188,60.027 34.099,60.115 34.099,60.484 34.188,60.573 34.188,61.062 34.442,61.316 34.452,61.306 U13.30@35.932,61.306
  MidLayer2 (*.G2) w0.127: v1(29.769,56.693) 29.718,56.693 29.87,56.54 v1(33.426,56.54)
  Bottom Layer (*.GBL) w0.127: R12.2@31.775,55.778 32.664,55.778 v1(33.426,56.54)
SPARE_LVDS_P: J1.S16 R12.1 U13.28 | length 60.1
  Top Layer (*.GTL) w0.127: J1.S16@-5.95,34.635 1.692,34.635 4.318,37.262 4.445,37.389 8.081,37.389 19.282,48.59 19.307,48.616 24.108,48.616 28.067,52.575 28.067,54.864 29.197,55.994 v1@29.197,57.302 ; v1(33.452,57.302) 33.579,57.302 33.858,57.582 33.858,59.998 33.846,60.01 33.846,60.589 33.858,60.602 33.858,62.027 34.137,62.306 U13.28@35.932,62.306
  MidLayer2 (*.G2) w0.127: v1(29.134,57.302) v1(33.452,57.302)
  Bottom Layer (*.GBL) w0.127: R12.1@31.775,58.064 32.69,58.064 v1(33.452,57.302)
START: J1.S4 U13.4 | length 70.4
  Top Layer (*.GTL) w0.127: v1(4.775,38.024) 8.356,38.024 19.202,48.87 24.003,48.87 27.813,52.68 27.813,55.016 28.664,55.867 28.664,59.258 29.286,59.88 29.286,74.295 v1(29.235,74.346) ; v1(34.061,74.32) 34.076,74.306 U13.4@35.932,74.306
  MidLayer2 (*.G2) w0.127: v1(29.235,74.346) 29.261,74.32 v1(34.061,74.32)
  Bottom Layer (*.GBL) w0.127: J1.S4@-5.95,34.635 1.565,34.635 4.775,37.846 v1(4.775,38.024)
SYNC: J1.S3 U13.3 | length 70.2
  Top Layer (*.GTL) w0.127: v1(4.877,36.449) 5.309,36.881 8.291,36.881 19.518,48.108 24.318,48.108 28.575,52.364 28.575,54.483 30.264,56.172 30.264,59.258 31.42,60.414 31.42,74.244 32.029,74.854 v1(34.442,74.854) 34.49,74.806 U13.3@35.932,74.806
  Bottom Layer (*.GBL) w0.127: J1.S3@-5.95,33.365 1.438,33.365 4.521,36.449 v1(4.877,36.449)
T: C1.1 C2.1 C3.1 C4.1 C5.2 C6.1 C7.1 C8.1 C9.1 C10.2 C21A.2 C21B.2 C21C.2 C21D.2 C22A.1 C22B.1 C22C.1 C22D.1 C23A.1 C23B.1 C23C.1 C23D.1 C24A.1 C24B.1 C24C.1 C24D.1 C26A.1 C26B.1 C26C.1 C26D.1 C27A.1 C27B.1 C27C.1 C27D.1 C28A.1 C28B.1 C28C.1 C28D.1 C43.NEG J1.P2 R1.1 R2.1 R9A.1 R9B.1 R9C.1 R9D.1 RN1.1 RN1.3 RN1.5 RN1.7 U2.1 U2.7 U3.1 U3.7 U7A.2 U7A.5 U7A.7 U7A.22 U7A.24 U7A.29 U7B.2 U7B.5 U7B.7 U7B.22 U7B.24 U7B.29 U7C.2 U7C.5 U7C.7 U7C.22 U7C.24 U7C.29 U7D.2 U7D.5 U7D.7 U7D.22 U7D.24 U7D.29 | length 127.5
  Top Layer (*.GTL) w0.254: v2(125.834,30.536) 126.025,30.345 U7A.2@126.025,28.648 ; v2(127.917,36.175) 127.925,36.167 U7A.24@127.925,34.348 ; U7A.5@127.975,28.648 127.975,27.024 v2(127.993,27.005) ; U7A.22@129.225,34.348 129.225,36.111 v2(129.238,36.124) ; v2(129.263,27.031) 129.275,27.042 U7A.7@129.275,28.648 ; v2(139.834,30.536) 140.025,30.345 U7B.2@140.025,28.648 ; v2(141.917,36.175) 141.925,36.167 U7B.24@141.925,34.348 ; U7B.5@141.975,28.648 141.975,27.024 v2(141.993,27.005) ; U7B.22@143.225,34.348 143.225,36.111 v2(143.238,36.124) ; v2(143.263,27.031) 143.275,27.042 U7B.7@143.275,28.648 ; v2(153.834,30.536) 154.025,30.345 U7C.2@154.025,28.648 ; v2(155.917,36.175) 155.925,36.167 U7C.24@155.925,34.348 ; U7C.5@155.975,28.648 155.975,27.024 v2(155.993,27.005) ; U7C.22@157.225,34.348 157.225,36.111 v2(157.238,36.124) ; v2(157.263,27.031) 157.275,27.042 U7C.7@157.275,28.648 ; v2(167.834,30.536) 168.025,30.345 U7D.2@168.025,28.648 ; v2(169.917,36.175) 169.925,36.167 U7D.24@169.925,34.348 ; U7D.5@169.975,28.648 169.975,27.024 v2(169.993,27.005) ; U7D.22@171.225,34.348 171.225,36.111 v2(171.238,36.124) ; v2(171.263,27.031) 171.275,27.042 U7D.7@171.275,28.648
  Top Layer (*.GTL) w1.27: C43.NEG@13.081,64.262 13.081,61.57 v3(13.106,61.57)
  Bottom Layer (*.GBL) w0.254: RN1.7@123.596,53.708 RN1.5@123.596,54.508 RN1.3@123.596,55.308 RN1.1@123.596,56.108 v1(123.596,56.972) ; R9A.1@123.955,32.111 124.006,32.161 v2(124.006,33.228) ; C26A.1@124.133,39.807 124.133,41.051 v2(124.234,41.153) ; C27A.1@124.844,13.391 124.844,14.864 v2(124.869,14.889) ; v2(126.088,22.078) 127.028,23.017 C23A.1@127.028,23.576 ; C28A.1@127.358,39.908 v2(127.358,41.204) ; C22A.1@130.559,40.112 130.559,41.331 v2(130.584,41.356) ; v2(131.168,21.976) C24A.1@131.168,23.144 ; v2(134.166,38.08) C21A.2@134.166,39.375 ; R9B.1@137.955,32.111 138.006,32.161 v2(138.006,33.228) ; C26B.1@138.133,39.807 138.133,41.356 v2(138.183,41.407) ; C27B.1@138.844,13.391 138.844,14.864 v2(138.869,14.889) ; v2(140.088,22.078) 141.028,23.017 C23B.1@141.028,23.576 ; C28B.1@141.358,39.908 v2(141.358,41.204) ; C22B.1@144.559,40.112 v2(144.559,41.382) ; v2(145.168,21.976) C24B.1@145.168,23.144 ; v2(148.166,38.08) C21B.2@148.166,39.375 ; R9C.1@151.955,32.111 152.006,32.161 v2(152.006,33.228) ; C26C.1@152.133,39.807 152.133,41.051 v2(152.234,41.153) ; C27C.1@152.844,13.391 152.844,14.864 v2(152.869,14.889) ; v2(154.088,22.078) 155.028,23.017 C23C.1@155.028,23.576 ; C28C.1@155.358,39.908 v2(155.358,41.204) ; C22C.1@158.559,40.112 158.559,41.331 v2(158.584,41.356) ; v2(159.168,21.976) C24C.1@159.168,23.144 ; v2(162.166,38.08) C21C.2@162.166,39.375 ; R9D.1@165.955,32.111 166.006,32.161 v2(166.006,33.228) ; C26D.1@166.133,39.807 166.133,41.051 v2(166.234,41.153) ; C27D.1@166.844,13.391 166.844,14.864 v2(166.869,14.889) ; v2(168.088,22.078) 169.028,23.017 C23D.1@169.028,23.576 ; C28D.1@169.358,39.908 v2(169.358,41.204) ; C22D.1@172.559,40.112 172.559,41.331 v2(172.584,41.356) ; v2(173.168,21.976) C24D.1@173.168,23.144 ; v2(176.166,38.08) C21D.2@176.166,39.375
  Bottom Layer (*.GBL) w1.27: v3(2.108,61.417) -2.303,61.417 J1.P2@-5.95,65.065 -4.975,66.04 v3(3.2,66.04) ; v3(85.166,76.098) 85.217,76.048 C1.1@85.217,73.482 C4.1@85.217,71.628 C3.1@85.217,69.596 C2.1@85.217,67.564 ; R1.1@98.806,68.834 v3(98.806,71.196) ; v3(142.24,74.93) 142.367,74.803 C9.1@142.367,72.136 C8.1@142.367,69.85 C7.1@142.367,67.564 C6.1@142.367,65.532 ; R2.1@155.931,67.767 155.931,70.333 v3(155.956,70.358)
TCK: P1.2 RN2.1 U13.109 | length 31.5
  Top Layer (*.GTL) w0.127: U13.109@55.232,77.606 56.481,77.606 v1(56.49,77.597)
  MidLayer2 (*.G2) w0.127: v1(56.49,77.597) 72.196,77.597 74.728,75.066 74.728,73.735 P1.2@76.327,72.136
  Bottom Layer (*.GBL) w0.127: RN2.1@72.898,78.078 72.898,77.673 74.955,75.616 74.955,73.508 P1.2@76.327,72.136
TDI: P1.8 RN2.7 U13.2 | length 48.9
  Top Layer (*.GTL) w0.127: v1(32.969,75.362) 33.025,75.306 U13.2@35.932,75.306
  MidLayer1 (*.G1) w0.127: v1(32.944,73.838) 32.944,75.336 v1(32.969,75.362)
  MidLayer2 (*.G2) w0.127: v1(32.944,73.838) 33.249,73.533 33.687,73.533 33.877,73.724 34.246,73.724 34.703,73.266 67.577,73.266 P1.8@68.707,72.136
  Bottom Layer (*.GBL) w0.127: P1.8@68.707,72.136 67.666,73.177 67.666,75.565 68.224,76.124 68.544,76.124 RN2.7@70.498,78.078
TDO: P1.4 RN2.3 U13.107 | length 26.5
  Top Layer (*.GTL) w0.127: U13.107@57.032,75.306 60.142,75.306 v1(60.173,75.336)
  MidLayer2 (*.G2) w0.127: v1(60.173,75.336) 65.37,75.336 65.955,75.921 71.984,75.921 72.06,75.997 72.846,75.21 72.846,73.735 73.787,72.795 P1.4@73.787,72.136
  Bottom Layer (*.GBL) w0.127: RN2.3@72.098,78.078 72.188,77.988 72.188,73.735 P1.4@73.787,72.136
TEC_DRIVE(+)A: J3A.1 R7A.1 U7A.15 | length 26.3
  Top Layer (*.GTL) w0.254: U7A.15@133.825,34.348 133.825,32.756 v2(133.835,32.746) ; R7A.1@134.4,18.84 136.553,20.993 136.536,21.011 v2(136.401,21.011)
  Top Layer (*.GTL) w1.27: J3A.1@130,13.34 131.651,13.34 134.4,16.089 R7A.1@134.4,18.84
  Bottom Layer (*.GBL) w0.254: v2(133.835,32.746) 134.369,32.746 136.477,30.637 136.477,24.821 136.401,24.745 v2(136.401,21.011)
TEC_DRIVE(+)B: J3B.1 R7B.1 U7B.15 | length 26.3
  Top Layer (*.GTL) w0.254: U7B.15@147.825,34.348 147.825,32.756 v2(147.835,32.746) ; R7B.1@148.4,18.84 v2@150.553,20.993 ; v2(150.549,21.011) 150.683,21.011 v2@150.701,20.993
  Top Layer (*.GTL) w1.27: J3B.1@144,13.34 145.651,13.34 148.4,16.089 R7B.1@148.4,18.84
  Bottom Layer (*.GBL) w0.254: v2(147.835,32.746) 148.369,32.746 150.477,30.637 ; v2(150.549,21.011) 150.549,24.745 150.625,24.821 150.625,30.637
TEC_DRIVE(+)C: J3C.1 R7C.1 U7C.15 | length 26.3
  Top Layer (*.GTL) w0.254: U7C.15@161.825,34.348 161.825,32.756 v2(161.835,32.746) ; R7C.1@162.4,18.84 164.553,20.993 164.536,21.011 v2(164.401,21.011)
  Top Layer (*.GTL) w1.27: J3C.1@158,13.34 159.651,13.34 162.4,16.089 R7C.1@162.4,18.84
  Bottom Layer (*.GBL) w0.254: v2(161.835,32.746) 162.369,32.746 164.477,30.637 164.477,24.821 164.401,24.745 v2(164.401,21.011)
TEC_DRIVE(+)D: J3D.1 R7D.1 U7D.15 | length 26.3
  Top Layer (*.GTL) w0.254: U7D.15@175.825,34.348 175.825,32.756 v2(175.835,32.746) ; R7D.1@176.4,18.84 178.553,20.993 178.536,21.011 v2(178.401,21.011)
  Top Layer (*.GTL) w1.27: J3D.1@172,13.34 173.651,13.34 176.4,16.089 R7D.1@176.4,18.84
  Bottom Layer (*.GBL) w0.254: v2(175.835,32.746) 176.369,32.746 178.477,30.637 178.477,24.821 178.401,24.745 v2(178.401,21.011)
TEC_DRIVE(-)A: C25A.1 C27A.2 J3A.2 L2A.2 TP8A.1 U7A.14 | length 36.7
  Top Layer (*.GTL) w0.254: v2(126.977,21.366) 127.054,21.29 L2A.2@127.054,18.682 ; U7A.14@133.825,28.648 134.453,28.648 v2(134.47,28.631)
  Top Layer (*.GTL) w1.27: L2A.2@127.8,19.429 127.054,18.682 127.054,12.172 128.425,10.8 J3A.2@130,10.8
  MidLayer1 (*.G1) w0.254: v2(126.977,21.366) 132.286,21.366 132.997,20.655 v2(134.42,20.655)
  Bottom Layer (*.GBL) w0.254: C27A.2@124.844,11.105 129.695,11.105 J3A.2@130,10.8 ; v2(134.42,20.655) 134.47,20.706 v2(134.47,28.631) 135.664,28.631 C25A.1@135.69,28.656
TEC_DRIVE(-)B: C25B.1 C27B.2 J3B.2 L2B.2 TP8B.1 U7B.14 | length 36.7
  Top Layer (*.GTL) w0.254: v2(140.977,21.366) 141.054,21.29 L2B.2@141.054,18.682 ; U7B.14@147.825,28.648 148.453,28.648 v2(148.47,28.631)
  Top Layer (*.GTL) w1.27: L2B.2@141.8,19.429 141.054,18.682 141.054,12.172 142.425,10.8 J3B.2@144,10.8
  MidLayer1 (*.G1) w0.254: v2(140.977,21.366) 146.286,21.366 146.997,20.655 v2(148.42,20.655)
  Bottom Layer (*.GBL) w0.254: C27B.2@138.844,11.105 143.695,11.105 J3B.2@144,10.8 ; v2(148.42,20.655) 148.47,20.706 v2(148.47,28.631) C25B.1@149.664,28.631
TEC_DRIVE(-)C: C25C.1 C27C.2 J3C.2 L2C.2 TP8C.1 U7C.14 | length 36.7
  Top Layer (*.GTL) w0.254: v2(154.977,21.366) 155.054,21.29 L2C.2@155.054,18.682 ; U7C.14@161.825,28.648 162.453,28.648 v2(162.47,28.631)
  Top Layer (*.GTL) w1.27: L2C.2@155.8,19.429 155.054,18.682 155.054,12.172 156.425,10.8 J3C.2@158,10.8
  MidLayer1 (*.G1) w0.254: v2(154.977,21.366) 160.286,21.366 160.997,20.655 v2(162.42,20.655)
  Bottom Layer (*.GBL) w0.254: C27C.2@152.844,11.105 157.695,11.105 J3C.2@158,10.8 ; v2(162.42,20.655) 162.47,20.706 v2(162.47,28.631) 163.664,28.631 C25C.1@163.69,28.656
TEC_DRIVE(-)D: C25D.1 C27D.2 J3D.2 L2D.2 TP8D.1 U7D.14 | length 36.7
  Top Layer (*.GTL) w0.254: v2(168.977,21.366) 169.054,21.29 L2D.2@169.054,18.682 ; U7D.14@175.825,28.648 176.453,28.648 v2(176.47,28.631)
  Top Layer (*.GTL) w1.27: L2D.2@169.8,19.429 169.054,18.682 169.054,12.172 170.425,10.8 J3D.2@172,10.8
  MidLayer1 (*.G1) w0.254: v2(168.977,21.366) 174.286,21.366 174.997,20.655 v2(176.42,20.655)
  Bottom Layer (*.GBL) w0.254: C27D.2@166.844,11.105 171.695,11.105 J3D.2@172,10.8 ; v2(176.42,20.655) 176.47,20.706 v2(176.47,28.631) 177.664,28.631 C25D.1@177.69,28.656
TEST1: J4.1 U13.24 | length 32.1
  Top Layer (*.GTL) w0.127: J4.1@7.518,72.288 7.518,71.572 12.517,66.573 v1(18.618,66.573) ; v1(34.214,64.618) 34.525,64.306 U13.24@35.932,64.306
  MidLayer2 (*.G2) w0.127: v1(18.618,66.573) 21.971,66.573 23.927,64.618 v1(34.214,64.618)
TEST2: J4.2 U13.116 | length 50.6
  Top Layer (*.GTL) w0.127: J4.2@7.518,79.35 7.518,80.055 12.071,84.607 46.203,84.607 51.689,79.121 51.689,78.74 51.732,78.697 U13.116@51.732,77.606
TEST3: J4.3 U13.21 | length 30.9
  Top Layer (*.GTL) w0.127: J4.3@8.153,72.288 8.153,71.572 12.517,67.208 v1@18.567,67.208 ; v1(34.036,65.811) 34.041,65.806 U13.21@35.932,65.806
  MidLayer2 (*.G2) w0.127: v1(18.567,67.234) 21.819,67.234 23.279,65.773 33.998,65.773 v1(34.036,65.811)
TEST4: J4.4 U13.117 | length 48.9
  Top Layer (*.GTL) w0.127: J4.4@8.153,79.35 8.153,80.055 12.452,84.353 45.466,84.353 51.232,78.587 U13.117@51.232,77.606
TEST5: J4.5 U13.20 | length 30
  Top Layer (*.GTL) w0.127: J4.5@8.788,72.288 8.788,71.572 12.517,67.843 v1(19.38,67.843) ; v1(34.239,66.497) 34.43,66.306 U13.20@35.932,66.306
  MidLayer2 (*.G2) w0.127: v1(19.38,67.843) 22.098,67.843 23.165,66.777 33.96,66.777 v1(34.239,66.497)
TEST6: J4.6 U13.120 | length 46.7
  Top Layer (*.GTL) w0.127: J4.6@8.788,79.35 8.788,80.055 12.833,84.099 44.486,84.099 49.732,78.854 U13.120@49.732,77.606